# Altium PCB PCB1.PcbDoc
Units mil, origin at the board's own origin, x right, y up, seen from the top; angles counter-clockwise.
Board outline 3900 x 3900 mil, 2 copper layers (Top Layer, Bottom Layer), stack 61.756 mil thick; 49 components, 44 nets, 197 pads, 97 vias.
Unrouted connection lines stored in the file: 2.
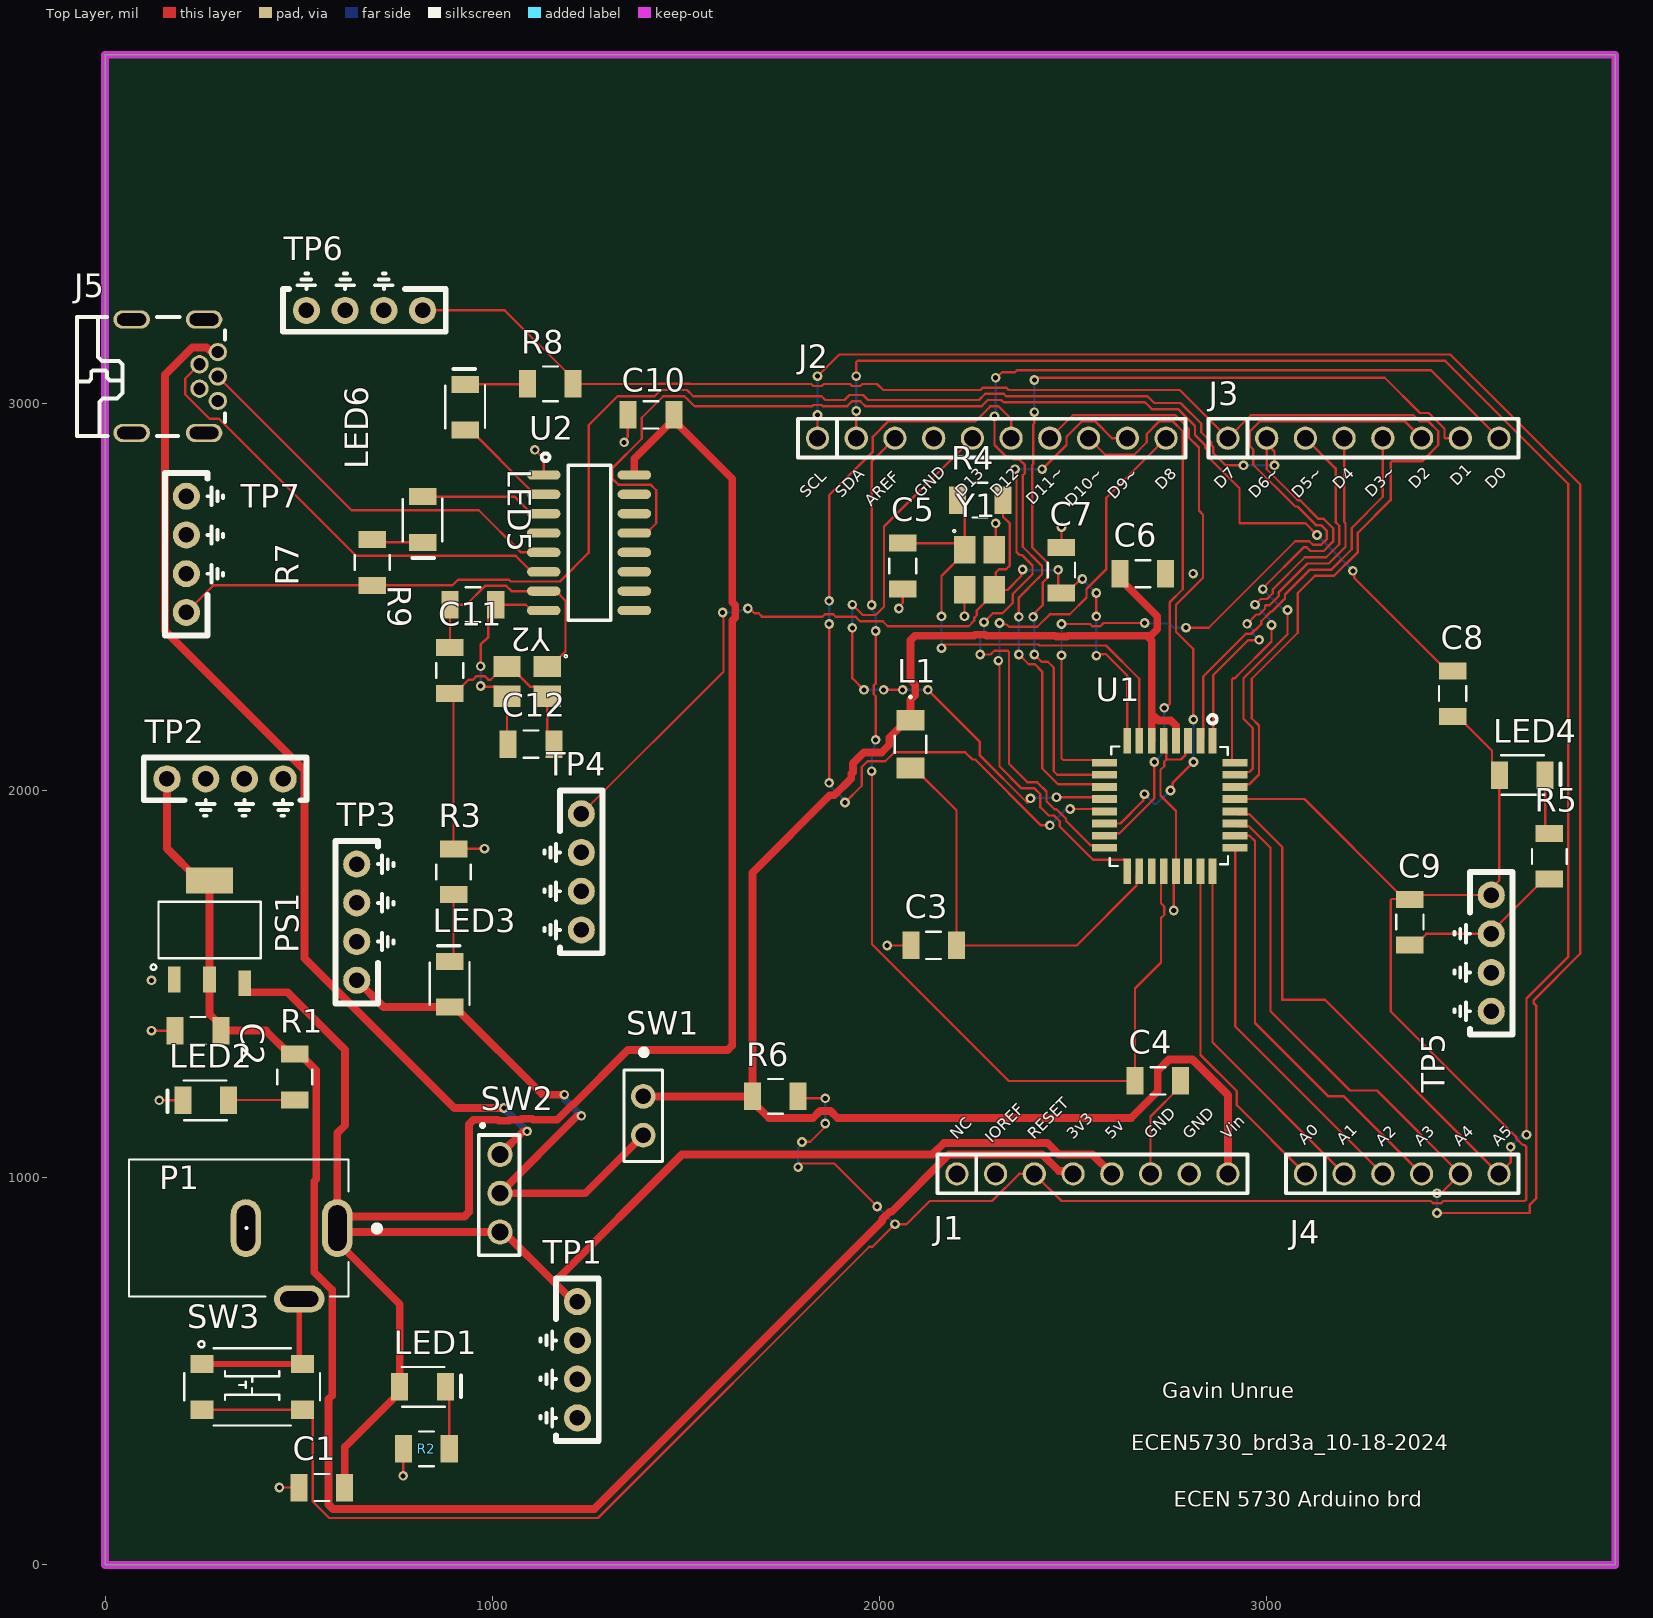
[diagram p0: Top Layer view]
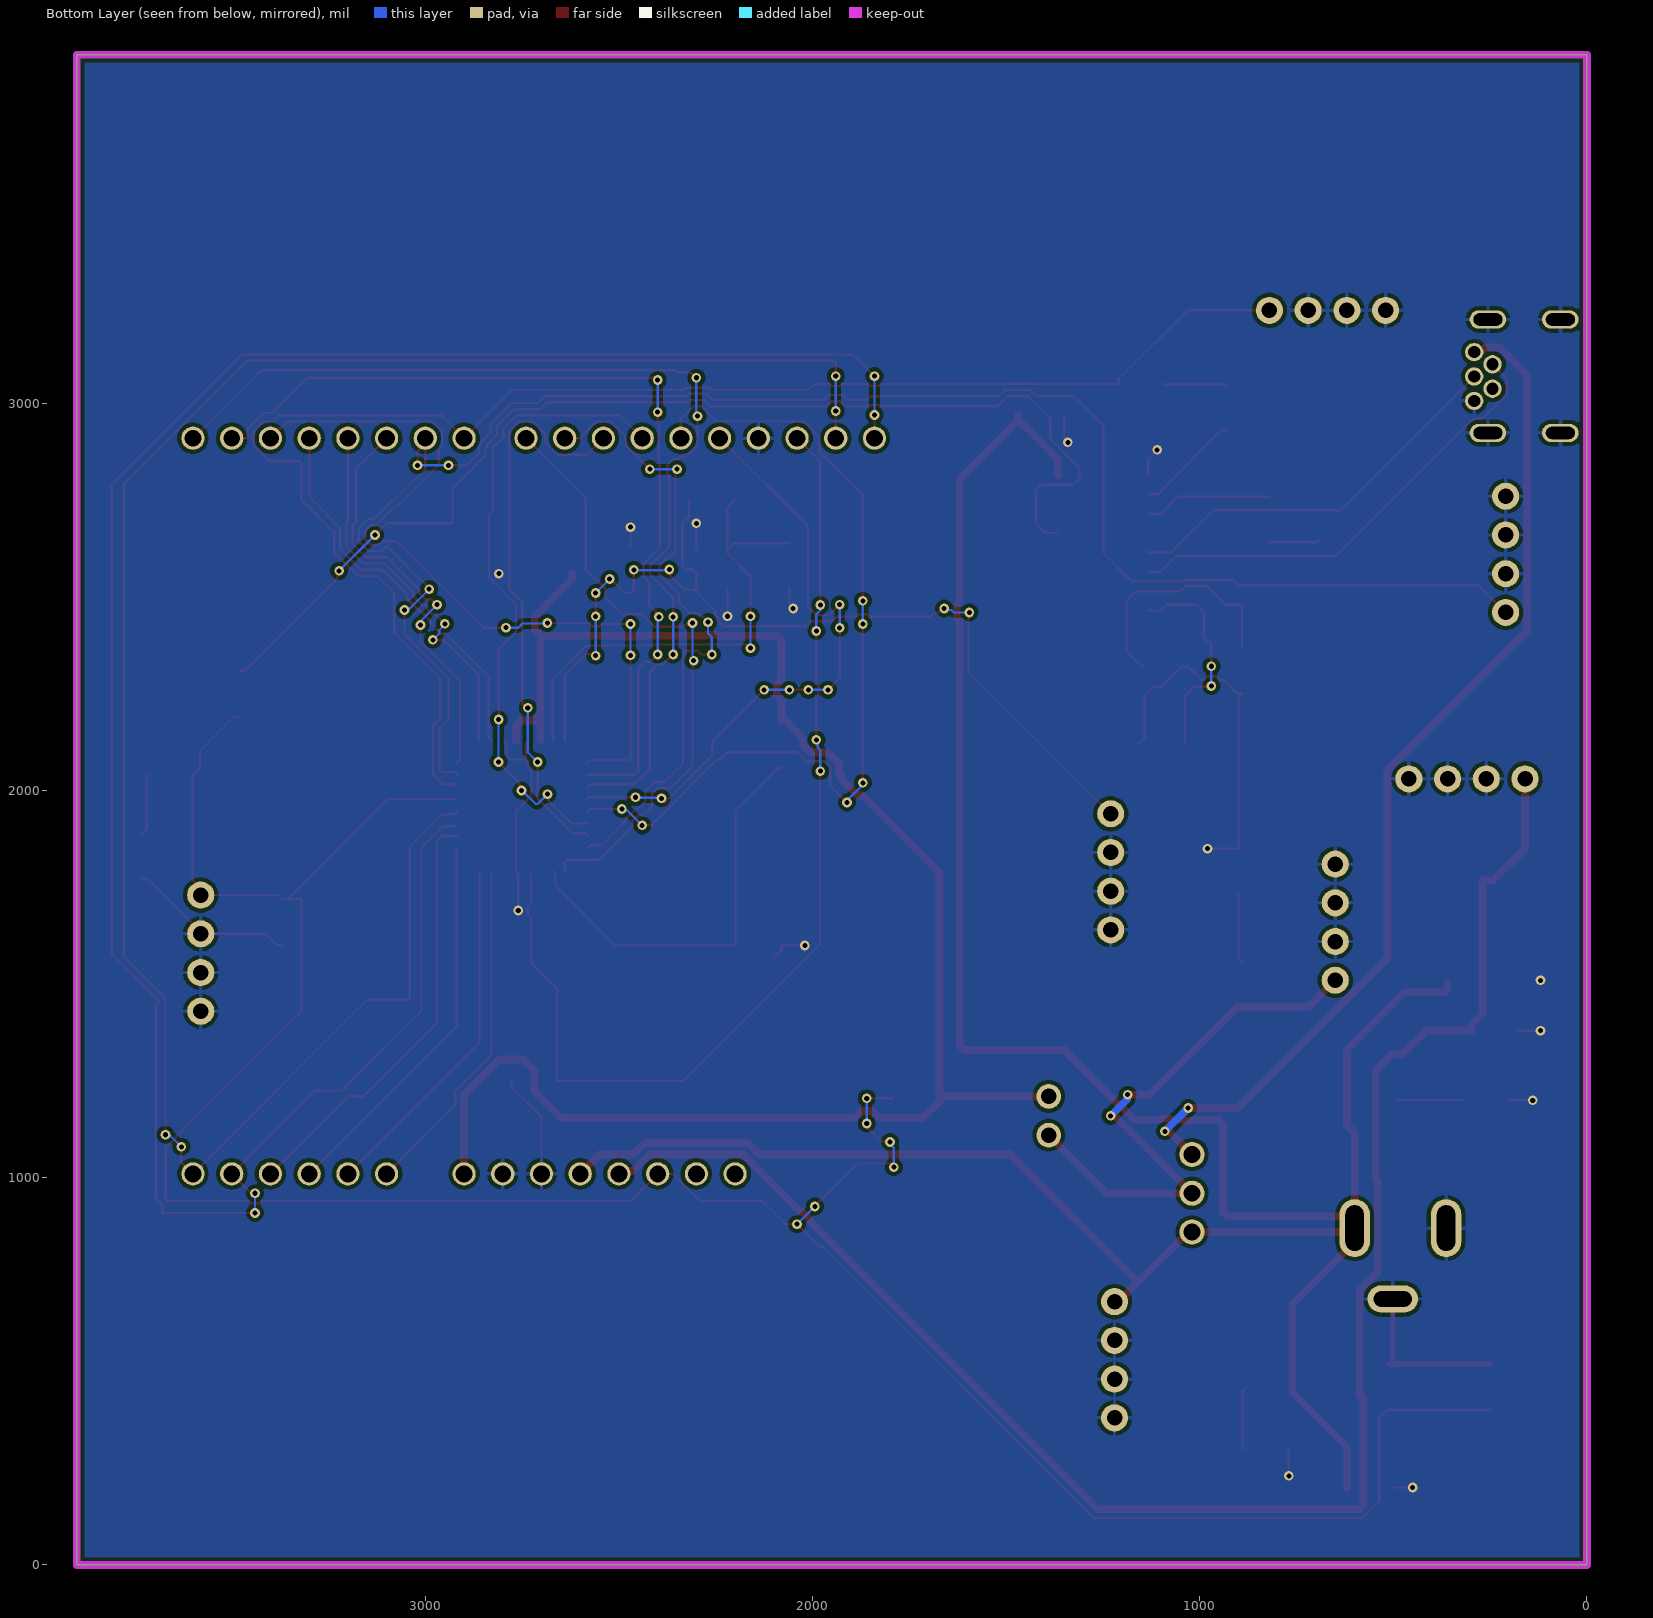
[diagram p1: Bottom Layer view, seen from below]
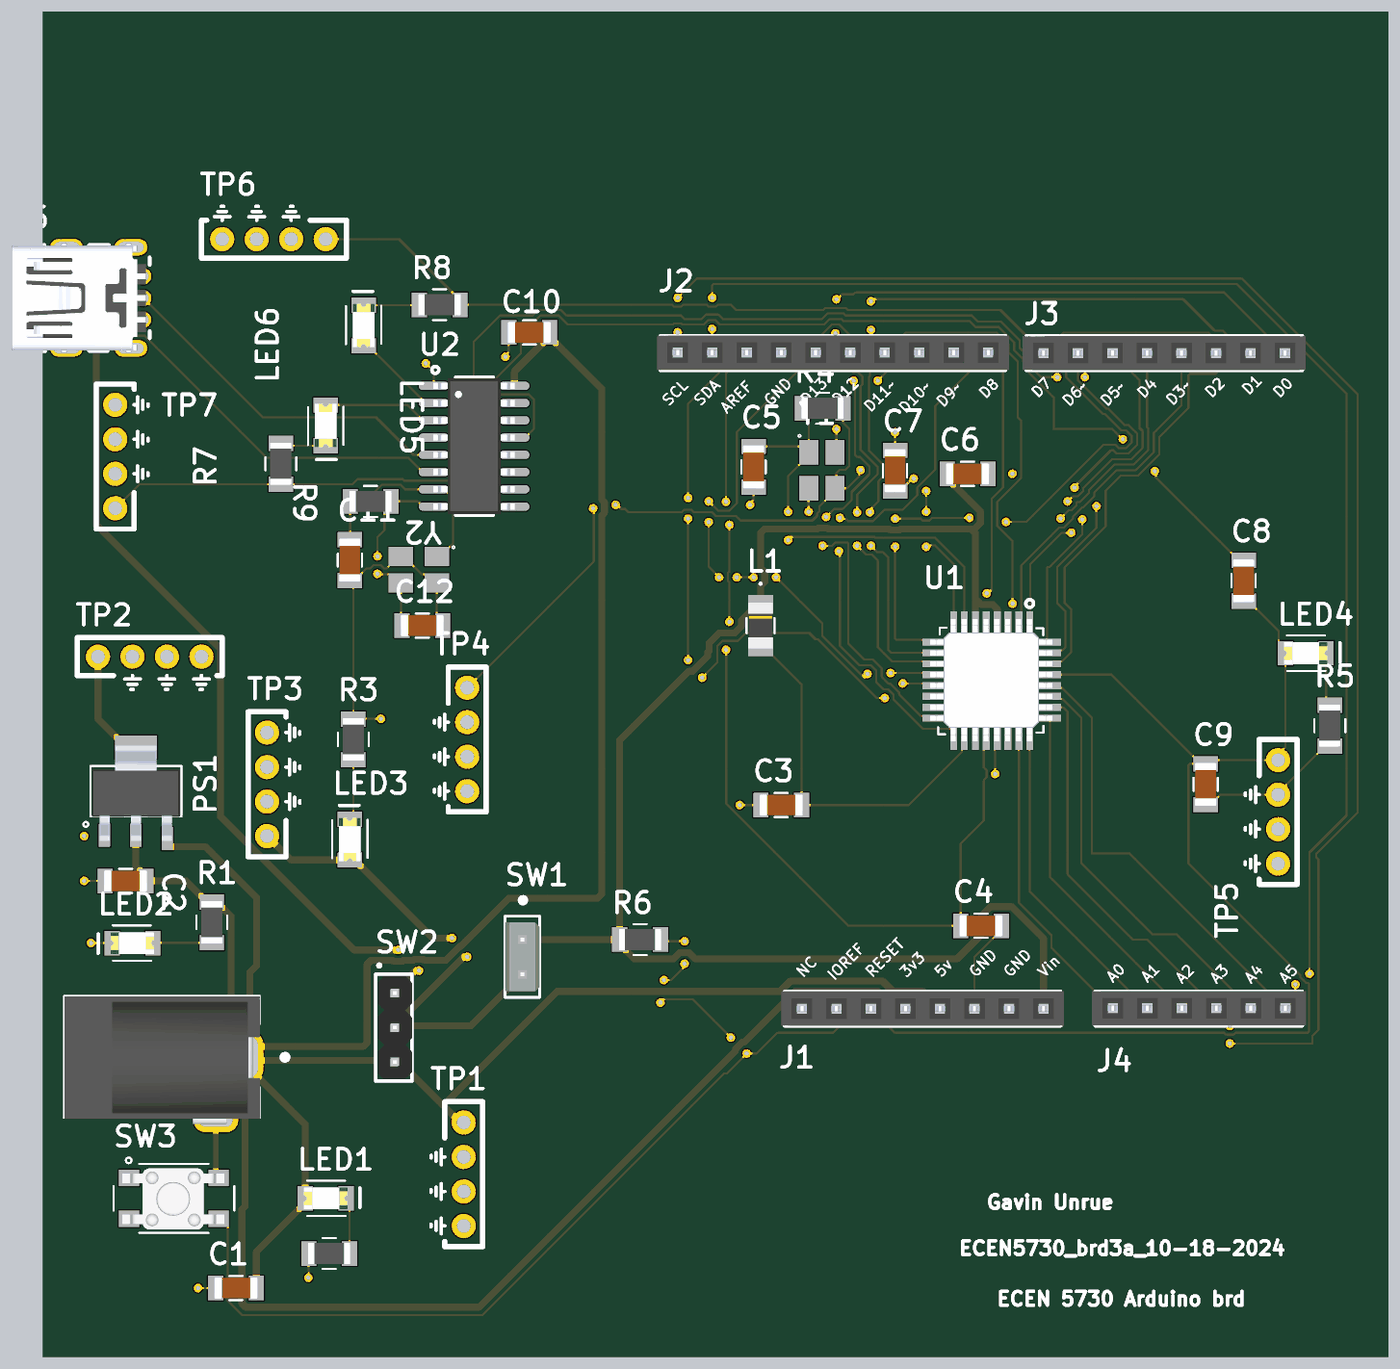
[diagram p2: 3D render of the assembled board from above, using the file's embedded part models]

## Layer stack, top to bottom
Top Solder: solder mask 1, SM-001, Dk 4
Top Layer: signal copper 1.378
Dielectric 1: core 59, Core-043, Dk 4.3
Bottom Layer: signal copper 1.378
Bottom Solder: solder mask 1, SM-001, Dk 4

## Board outline
0,0 3900,0 3900,3900 0,3900 0,1250

## Design rules (kind name [scope] priority, off if disabled: settings)
BoardOutlineClearance [All] p1: gap=10 ignorepadtopadclearanceinfootprint=FALSE except(0: Arc-SplitContinuation Track-SplitContinuation SMDPad-SplitContinuation THPad-SplitContinuation Via-SplitContinuation Fill-SplitContinuation Poly-SplitContinuation Region-SplitContinuation Text-SplitContinuation)
Clearance [All] p1: gap=10 ignorepadtopadclearanceinfootprint=FALSE
PlaneClearance [All] p1: clearance=10
PlaneConnect [All] p1: planeconnectstyle=Direct reliefexpansion=20 reliefentries=4 reliefconductorwidth=10 reliefairgap=10
PolygonConnect [All] p1: thpad.connectstyle=Relief thpad.reliefconductorwidth=10 thpad.reliefentries=4 thpad.polygonreliefangle="90 Angle" thpad.airgapwidth=10 smdpad.connectstyle=Direct smdpad.reliefconductorwidth=10 smdpad.reliefentries=4 smdpad.polygonreliefangle="90 Angle" smdpad.airgapwidth=10 via.connectstyle=Direct via.reliefconductorwidth=10 via.reliefentries=4 via.polygonreliefangle="90 Angle" via.airgapwidth=10
RoutingVias [All] p1: holewidth=13 width=25 viastyle="Through Hole" minholewidth=13 minwidth=25 maxholewidth=60 maxwidth=80
SolderMaskExpansion [All] p1: expansion=4 istentingtop=FALSE
UnRoutedNet [All] p1: checkbadconnections=TRUE
Width "Schematic Width Constraint" [InNet('+5')] p1: maxlimit=100 minlimit=10 preferedwidth=20 minimp=50.000000 maximp=50.000000 favimp=50.000000
Width [All] p2: maxlimit=100 minlimit=6 preferedwidth=6 minimp=50.000000 maximp=50.000000 favimp=50.000000
27 further rules are at their usual default settings.

## Components (designator, comment, footprint, x,y, rotation, side; value= is the part's Value field where it differs from the comment)
C1 "22uF" 1206_Passive_Capacitor 560,200 r0 top
C2 "1uF" 1206_Passive_Capacitor 240,1380 r0 top
C3 "22uF" 1206_Passive_Capacitor 2140,1600 r180 top
C4 "22uF" 1206_Passive_Capacitor 2719,1250 r0 top
C5 "22pF" 1206_Passive_Capacitor 2060,2580 r90 top
C6 "22uF" 1206_Passive_Capacitor 2680,2560 r180 top
C7 "22pF" 1206_Passive_Capacitor 2470,2569 r270 top
C8 "1uF" 1206_Passive_Capacitor 3480,2250 r270 top
C9 "47nF" 1206_Passive_Capacitor 3370,1660 r90 top
C10 "22uF" 1206_Passive_Capacitor 1410,2970 r180 top
C11 "22pF" 1206_Passive_Capacitor 890,2310 r90 top
C12 "22pF" 1206_Passive_Capacitor 1100,2120 r180 top
J1 "PPTC081LFBN-RC" 8_PIN_ARD-PWR_100MIL 2200,1010 r0 top value=Female
J2 "PPTC101LFBN-RC" 10_PIN_ARDUINO_100MIL 1840,2910 r0 top value=Female
J3 "PPTC081LFBN-RC" 8_PIN_ARD-DIG_100MIL 2900,2910 r0 top value=Female
J4 "PPTC061LFBN-RC" 6_PIN_ARD-Analog_100mil 3100,1010 r0 top value=Female
J5 "USB Mini" USB_MINI_B 180,3070 r270 top value="USB mini B"
L1 "FB_10uH_1206" AIML-1206_ABR-M 2080,2120 r270 top
LED1 "Red" LED_1206 820,460 r0 top
LED2 "Red" LED_1206 260,1200 r180 top
LED3 "Red" LED_1206 890,1500 r90 top
LED4 "Red" LED_1206 3660,2040 r0 top
LED5 "Red" LED_1206 820,2700 r270 top
LED6 "Red" LED_1206 930,2990 r90 top
P1 "Power Jack" Power_Jack 600,870 r180 top value="CONN PWR JACK 2X5.5MM SOLDER"
PS1 "AMS1117-3.3" LDO 270,1640 r0 top value="IC REG LINEAR 3.3V 800MA SOT223"
R1 "1k" 1206_Passive_Resitor 490,1260 r90 top value="1K Ohm"
R2 "1k" 1206_Passive_Resitor 830,300 r0 top value="1K Ohm"
R3 "1k" 1206_Passive_Resitor 900,1790 r270 top value="1K Ohm"
R4 "1M" 1206_Passive_Resitor 2260,2750 r180 top value="1M Ohm"
R5 "1k" 1206_Passive_Resitor 3730,1830 r90 top value="1K Ohm"
R6 "10k" 1206_Passive_Resitor 1731,1210 r0 top value=10KOhm
R7 "1k" 1206_Passive_Resitor 690,2589 r90 top value="1K Ohm"
R8 "1k" 1206_Passive_Resitor 1150,3050 r180 top value="1K Ohm"
R9 "1M" 1206_Passive_Resitor 950,2480 r180 top value="1M Ohm"
SW1 "led_on_off_sw" 2Pin-Header-Conn 1390,1210 r270 top
SW2 "PREC003SAAN-RC" 3_PIN_100mil 1020,1060 r270 top value="CONN HEADER VERT 3POS 2.54MM"
SW3 "TL3305AF160QG" Switch_JLC 380,460 r0 top
TP1 "5v TP" TP10x_Probe 1220,530 r270 top
TP2 "3.3v tp" TP10x_Probe 310,2030 r0 top
TP3 "rg5vtp" TP10x_Probe 650,1660 r90 top
TP4 "atmegaXTALtp" TP10x_Probe 1230,1790 r270 top
TP5 "resettp" TP10x_Probe 3580,1580 r270 top
TP6 "rxtp" TP10x_Probe 670,3240 r180 top
TP7 "txtp" TP10x_Probe 210,2610 r90 top
U1 "ATMEGA328P-ANR" ATMega328P 2750,1960 r90 top value="IC MCU 8BIT 32KB FLASH 32TQFP"
U2 "CH340G" "USB to serial" 1250,2640 r270 top value="USB to Serial"
Y1 "X322516MLB4SI" "Crystal resonator" 2260,2570 r270 top value=16MHz
Y2 "X322512MSB4SI" "Crystal resonator" 1090,2280 r180 top value=12MHz

## Footprints (in the part's own frame and the unit in brackets; to place one, negate y for a bottom-side part, rotate by r counter-clockwise, add the part's x,y. Pads: shape width x height; smd on the part's side, far side on the other; paste and mask are expansions set on the pad)
2Pin-Header-Conn [mm]
  round 1.62 hole 1.02: 1(0,0) 2(2.54,0)
  silkscreen extent -3.03,-1.27 4.26,1.26, body extent -1.27,-1.27 3.81,1.27, height 8.13
3_PIN_100mil [mm]
  round 1.65 hole 1.1: 1(0,0) 2(2.54,0) 3(5.08,0)
  silkscreen extent -2,-1.4 6.6,1.27, body extent -1.14,-1.27 6.48,1.27, height 8.38
6_PIN_ARD-Analog_100mil [mil]
  round 60 hole 43.31: 1(0,0) 2(100,0) 3(200,0) 4(300,0) 5(400,0) 6(500,0)
  silkscreen extent -50,-50 550,50, body extent -59,-49 561,51, height 335
8_PIN_ARD-DIG_100MIL [mil]
  round 60 hole 43.31: 1(0,0) 2(100,0) 3(200,0) 4(300,0) 5(400,0) 6(500,0) 7(600,0) 8(700,0)
  silkscreen extent -50,-50 750,50, body extent -60,-50 760,50, height 335
8_PIN_ARD-PWR_100MIL [mil]
  round 60 hole 43.31: 1(0,0) 2(100,0) 3(200,0) 4(300,0) 5(400,0) 6(500,0) 7(600,0) 8(700,0)
  silkscreen extent -50,-50 750,50, body extent -60,-50 760,50, height 335
10_PIN_ARDUINO_100MIL [mil]
  round 60 hole 43.31: 1(0,0) 2(100,0) 3(200,0) 4(300,0) 5(400,0) 6(500,0) 7(600,0) 8(700,0) 9(800,0) 10(900,0)
  silkscreen extent -50,-50 950,50, body extent -60,-49 960,51, height 335
1206_Passive_Capacitor [mil]
  rect 44x71 smd: 1(-59,0) 2(59,0)
  silkscreen extent -19,-35 19,35, body extent -63,-31 63,32, height 50
1206_Passive_Resitor [mil]
  rect 44x71 smd: 1(-59,0) 2(59,0)
  silkscreen extent -19,-45 19,45, body extent -61,-31 61,31, height 26
AIML-1206_ABR-M [mil]
  rect 54x73 smd paste+0 mask+0: 1(-61.5,0) 2(61.5,0)
  silkscreen extent -124,-41 22,41, body extent -66,-36 66,36, height 55
ATMega328P [mm]
  rect 1.65x0.508 smd mask+0.025: 1(4.28,-2.794) 2(4.28,-2.007) 3(4.28,-1.194) 4(4.28,-0.406) 5(4.28,0.406) 6(4.28,1.194) 7(4.28,2.007) 8(4.28,2.794) 17(-4.28,2.794) 18(-4.28,2.007) 19(-4.28,1.194) 20(-4.28,0.406) 21(-4.28,-0.406) 22(-4.28,-1.194) 23(-4.28,-2.007) 24(-4.28,-2.794)
  rect 0.508x1.65 smd mask+0.025: 9(2.843,4.28) 10(2.056,4.28) 11(1.243,4.28) 12(0.455,4.28) 13(-0.357,4.28) 14(-1.145,4.28) 15(-1.958,4.28) 16(-2.745,4.28) 25(-2.745,-4.28) 26(-1.958,-4.28) 27(-1.145,-4.28) 28(-0.357,-4.28) 29(0.455,-4.28) 30(1.243,-4.28) 31(2.056,-4.28) 32(2.843,-4.28)
  silkscreen extent -3.94,-3.81 5.97,3.94, body extent -4.45,-4.47 4.55,4.53, height 1.16
"Crystal resonator" [mm]
  rect 1.8x1.4 smd: 1(-1.32,-1.02) 2(1.32,-1.02) 3(1.32,0.92) 4(-1.32,0.92)
  silkscreen extent -2.63,-1.79 -2.45,-1.61, body extent -1.65,-1.2 1.65,1.2, height 0.8
LDO [mm]
  rect 0.838x1.7 smd: 1(-2.311,-3.25) 2(0,-3.25) 3(2.311,-3.5)
  rect 3.099x1.7 smd: 4(0,3.25)
  silkscreen extent -3.86,-2.62 3.35,1.85, body extent -3.25,-3.65 3.25,3.35, height 1.85
LED_1206 [mil]
  rect 44x71 smd: 1(-59,0) 2(59,0)
  silkscreen extent -54,-51 99,51, body extent -63,-31 63,31, height 28
Power_Jack [mm]
  oval 2x3.8 hole 1.2 slot 3 at 90 deg: 1(0,0) 2(6,0)
  oval 3.3x1.8 hole 1 slot 2.5 at 0 deg: 3(2.5,4.65)
  silkscreen extent -2.79,-4.5 13.68,4.5, body extent -0.76,-4.45 13.64,4.95, height 11.49
Switch_JLC [mm]
  rect 1.5x1.2 smd: 1(-3.3,1.5) 2(3.3,1.5) 3(-3.3,-1.5) 4(3.3,-1.5)
  silkscreen extent -4.44,-2.54 4.45,3, body extent -3.8,-2.29 3.7,2.21, height 3.7
TP10x_Probe [mil] "Small Probs footprint"
  round 70 hole 40: 1(-150,0) 2(-50,0) 2(50,0) 2(150,0)
  silkscreen extent -210,-95 210,55
"USB to serial" [mil]
  oval 24x86.61 smd: 1(-175,-117) 2(-125,-117) 3(-75,-117) 4(-25,-117) 5(25,-117) 6(75,-117) 7(125,-117) 8(175,-117) 9(175,117) 10(125,117) 11(75,117) 12(25,117) 13(-25,117) 14(-75,117) 15(-125,117) 16(-175,117)
  silkscreen extent -231,-122 201,56, body extent -197,-118 197,118, height 71
USB_MINI_B [mm]
  round 1.2 hole 0.8: 1(-1.58,2.826) 2(-0.78,1.622) 3(0.02,2.826) 4(0.82,1.622) 5(1.62,2.826)
  oval 1.2x2.4 hole 0.8 slot 1.9 at 90 deg: 6(-3.72,1.924) 7(3.72,1.924) 8(-3.72,-2.826) 9(3.72,-2.826)
  silkscreen extent -3.89,-6.42 3.93,3.3, body extent -4.04,-6.83 4.06,3.02, height 3.98

## Part data
C1 C3 C4 C6 C10: library part C_22uF_1206, "22uF ±10% 25V X5R 1206 Multilayer Ceramic Capacitors MLCC - SMD/SMT RoHS", LCSC Part#=C12891, MFR Part #=CL31A226KAHNNNE, Datasheet=https://datasheet.lcsc.com/lcsc/1811031514_Samsung-Electro-Mechanics-CL31A226KAHNNNE_C12891.pdf, Type=basic
C2 C8: library part C_1uF_1206, "MULTILAYER CERAMIC CAPACITORS MLCC - SMD/SMT 1UF 50V 1206 ROHS", LCSC Part#=C1848, MFR Part #=CL31B105KBHNNNE, Digikey Link=https://www.digikey.com/product-detail/en/C1206C105M4RACTU/399-8150-1-ND/3471873/?itemSeq=304982366, Type=Basic
C5 C7 C11 C12: library part C_22pF_1206, "22pF ±5% 1kV C0G 1206 Multilayer Ceramic Capacitors MLCC - SMD/SMT RoHS", LCSC Part#=C107174, MFR Part #=CC1206JKNPOCBN220, Datasheet=https://datasheet.lcsc.com/lcsc/1810241219_YAGEO-CC1206JKNPOCBN220_C107174.pdf, Type=Extended
C9: library part C_47nF_1206, "47nF ±5% 50V C0G 1206 Multilayer Ceramic Capacitors MLCC - SMD/SMT RoHS", LCSC Part#=C21812, MFR Part #=GRM31M5C1H473JA01L, Datasheet=https://datasheet.lcsc.com/lcsc/1810201313_Murata-Electronics-GRM31M5C1H473JA01L_C21812.pdf, Type=Extended
J1: library part JF_8_PIN_FEMA_ARD-Pwr, "8 Position Header Connector 0.100\" (2.54mm) Through Hole Tin", LCSC Part#=C27438, Digikey Link=https://www.digikey.com/product-detail/en/PPTC081LFBN-RC/S7006-ND/810147/?itemSeq=304982354, MFR Part #=PPTC081LFBN-RC, Type=Extended
J2: library part JF_10_PIN_FEMA_ARDUINO, "10 Position Header Connector 0.100\" (2.54mm) Through Hole Tin", LCSC Part#=C225507, Digikey Link=https://www.digikey.com/product-detail/en/PPTC101LFBN-RC/S7008-ND/810149/?itemSeq=304982352, MFR Part #=PPTC101LFBN-RC, Type=Extended
J3: library part JF_8_PIN_FEMA_ARD-Dig, "8 Position Header Connector 0.100\" (2.54mm) Through Hole Tin", LCSC Part#=C27438, Digikey Link=https://www.digikey.com/product-detail/en/PPTC081LFBN-RC/S7006-ND/810147/?itemSeq=304982354, MFR Part #=PPTC081LFBN-RC, Type=Extended
J4: library part JF_6_PIN_FEMA_ARD-Anolog, "6 Position Header Connector 0.100\" (2.54mm) Through Hole Tin", LCSC Part#=C40877, Digikey Link=https://www.digikey.com/product-detail/en/PPTC061LFBN-RC/S7004-ND/810145/?itemSeq=304982353, MFR Part #=PPTC061LFBN-RC, Type=Extended
J5: library part J_USB_B_Mini, "Through Hole USB Connectors RoHS", LCSC Part#=C46398, MFR Part #=920-462A2021D10102, Datasheet=https://datasheet.lcsc.com/szlcsc/2103081233_Jing-Extension-of-the-Electronic-Co-920-462A2021D10102_C46398.pdf, Type=Extended
L1: "25mA 10uH ±10% 800mΩ 1206  Inductors (SMD) ROHS", LCSC Part#=C1051, MFR Part #=CMI321609X100KT, Mfr_Name="FH (Guangdong Fenghua Advanced Tech)", Datasheet=https://datasheet.lcsc.com/lcsc/1810311314_FH--Guangdong-Fenghua-Advanced-Tech-CMI321609X100KT_C1051.pdf, Type=Basic
LED1 LED2 LED3 LED4 LED5 LED6: library part LED_RED_1206, "Red 621~631nm 1206 Light Emitting Diodes (LED) RoHS", LCSC Part#=C93133, MFR Part #=15-21/R6C-FQ1R1B/2T, Datasheet=https://datasheet.lcsc.com/szlcsc/1811151241_Everlight-Elec-15-21-R6C-FQ1R1B-2T_C93133.pdf, Type=Extended
P1: library part "P_Power Jack", "Power Barrel Connector Jack 2.10mm ID (0.083\"), 5.50mm OD (0.217\") Through Hole, Right Angle", LCSC Part#=C136744, MFR Part #=PJ-102A, Digikey Link=https://www.digikey.com/product-detail/en/PJ-102A/CP-102A-ND/275425/?itemSeq=304982367, Type=Extended
PS1: library part PS_AMS_LDO_3v3, "LOW DROPOUT REGULATORS(LDO) POSITIVE FIXED 1.3V @ 800MA 15V 3.3V 1A SOT-223 ROHS", LCSC Part#=C6186, MFR Part #=AMS1117-3.3, Type=Basic
R1 R2 R3 R5 R7 R8: library part R_1K_1206, "CHIP RESISTOR - SURFACE MOUNT 1KOHMS ±1% 1/4W 1206 ROHS", LCSC Part#=C4410, MFR Part #=RNCP1206FTD1K00CT, Digikey Link=https://www.digikey.com/product-detail/en/RNCP1206FTD1K00/RNCP1206FTD1K00CT-ND/2240675/?itemSeq=304982373, Type=Basic
R4 R9: library part R_1M_1206, "CHIP RESISTOR - SURFACE MOUNT 1MOHMS ±1% 1/4W 1206 ROHS", LCSC Part#=C17927, MFR Part #=RMCF1206JT1M00, Digikey Link=https://www.digikey.com/product-detail/en/RMCF1206JT1M00/RMCF1206JT1M00CT-ND/1942830/?itemSeq=304982358, Type=Basic
R6: library part R_10KOhm_1206, "10 kOhms ±5% 0.25W, 1/4W Chip Resistor 1206 (3216 Metric) Automotive AEC-Q200 Thick Film", LCSC Part#=C17902, MFR Part #=RMCF1206FT10K0, Digikey Link=https://www.digikey.com/en/products/detail/stackpole-electronics-inc/RMCF1206FT10K0/1759669, Type=Basic
SW1: library part SW_2Pin_100mil_Switch, "2Pin Header", LCSC Part#=C124375, Type=Extended
SW2: library part SW_3Pin_100mil_Switch, "Connector Header Through Hole 3 position 0.100\" (2.54mm)", LCSC Part#=C49257, Digikey Link=https://www.digikey.com/product-detail/en/PREC003SAAN-RC/S1012EC-03-ND/2774851/?itemSeq=304982371, MFR Part #=PREC003SAAN-RC, Type=Extended
SW3: library part SW_Push_Button_JLC, "Tactile Switch SPST-NO Top Actuated Surface Mount", LCSC Part#=C2837550, MFR Part #=KH-4.5X4.5X4.3H-STM, Datasheet=https://datasheet.lcsc.com/lcsc/2106081532_Shenzhen-Kinghelm-Elec-KH-4.5X4.5X4.3H-STM_C2837550.pdf, Type=Extended
TP1 TP2 TP3 TP4 TP5 TP6 TP7: library part TP_10x_Probe, "Test Point 300 mil centers"
U1: library part U_ATMega328P, "AVR AVR® ATmega Microcontroller IC 8-Bit 20MHz 32KB (16K x 16) FLASH 32-TQFP (7x7)", LCSC Part#=C14877, MFR Part #=ATMEGA328P-AU, Digikey Link=https://www.digikey.com/product-detail/en/ATMEGA328P-ANR/ATMEGA328P-ANRCT-ND/2774230/?itemSeq=304982365, Type=Basic
U2: library part U_USBtoSerial, "Transceiver USB 2.0 2Mbps SOP-16_150mil USB ICs RoHS", LCSC Part#=C14267, Datasheet=https://datasheet.lcsc.com/lcsc/2008191806_WCH-Jiangsu-Qin-Heng-CH340G_C14267.pdf, MFR Part #=CH340G, Type=Basic
Y1: library part X_16Mhz_Res, "±10ppm 16000000Hz -40℃~85℃ 贴片无源晶振 60Ω 9pF SMD3225-4P Crystals ROHS", LCSC Part#=C13738, MFR Part #=X322516MLB4SI, Type=Basic
Y2: library part X_12MHz_Res, "SMD Crystal Resonators 12MHz ±10ppm SMD-3225_4P RoHS", LCSC Part#=C9002, Datasheet=https://datasheet.lcsc.com/szlcsc/Yangxing-Tech-X322512MSB4SI_C9002.pdf, MFR Part #=X322512MSB4SI, Type=Basic

## Via types
v1: diameter 25, hole 13, Top Layer to Bottom Layer, 97 vias

## Nets (pads, with @x,y where several pads share a name; then routed paths per layer and width w, separated by ;. In a path a pad name is that pad's centre, name@x,y a point inside that pad or via, vN(x,y) a via of type N, cw(c..) or ccw(c..) an arc to the next point about the centre after c; other vN are vias at no path point)
3v: C2.2 J1.4 PS1.2 PS1.4 R1.2 TP2.1 | length 4489.5
  Top Layer w20: TP2.1 160,1850.42 242.46,1767.95 PS1.4 PS1.2 270,1422.5 299,1393.5 C2.2 415.5,1380 476.5,1319 R1.2 503.5,1319 545.5,1277 545.5,995.98 540.63,991.11 540.63,755.8 586.54,709.89 586.54,437.82 577,428.29 577,156.22 588.72,144.5 1263.79,144.5 2007.5,888.21 2007.5,893.46 2026.54,912.5 2031.79,912.5 2179.29,1060 2420.71,1060 2463.06,1017.65 2492.35,1017.65 J1.4
+5: C1.2 C10.1 J1.5 LED1.1 P1.1 PS1.3 SW2.3 TP1.1 U2.16 | length 7158.3
  Top Layer w20: PS1.3 361,1485.24 367.5,1478.74 471.26,1478.74 620,1330 620,1135.66 600,1115.66 P1.1@600,872.87 ; C1.2 619,304.5 761,446.5 LED1.1 761,673.57 600,834.57 600,860 P1.1 ; TP1.1 1210,680 1160,730 ; U2.16 1367,2857 1454.5,2944.5 1457,2944.5 C10.1@1469,2956.5 ; C10.1 C10.1@1469,2956.5 ; J1.5 2550,1060 2463.14,1060 2433.14,1090 2166.86,1090 2136.86,1060 1490,1060 1160,730 ; P1.1 P1.1@600,872.87 ; P1.1 610,860 SW2.3 1030,860 1160,730 ; P1.1@600,872.87 627.13,900 928.28,900 940,911.72 940,1138.28 951.72,1150 1014.04,1150 1016.54,1147.5 1043.46,1147.5 1045.96,1150 1074.04,1150 1076.54,1152.5 1103.46,1152.5 1105.96,1150 1167.57,1150 1207.57,1190 1210,1190 1350,1330 1608.28,1330 1620,1341.72 1620,2439.04 1627.5,2446.54 1627.5,2478.46 1620,2485.96 1620,2805.5 C10.1@1469,2956.5
dtr: C8.1 U2.13 | length 2991.8
  Top Layer w6: U2.13 1398.31,2665 1423.31,2690 1423.31,2775.36 1408.66,2790 1325.34,2790 1310.69,2804.64 1310.69,2833.22 1386,2908.53 1386,2962.88 1441.62,3018.5 1496.38,3018.5 1522.38,2992.5 1826.44,2992.5 1829.44,2995.5 1850.56,2995.5 1853.56,2992.5 1916.44,2992.5 1929.44,3005.5 1950.56,3005.5 1963.56,2992.5 2263.81,2992.5 2279.81,3008.5 2314.19,3008.5 2320.19,3002.5 2685.68,3002.5 2703.18,2985 2771.07,2985 2815,2941.07 2815,2918.44 2841,2892.44 2841,2885.56 2846,2880.56 2846,2864.81 2930,2780.81 2930,2690 3100,2690 v1(3130,2660) ; v1(3222.63,2567.37) 3226.27,2563.73 3226.27,2549.23 3466.5,2309 C8.1
  Bottom Layer w6: v1(3130,2660) v1(3222.63,2567.37)
GND: C1.1 C2.1 C3.2 C4.2 C5.1 C6.1 C7.1 C9.1 C10.2 C11.1 C12.1 J1.6 J1.7 J2.4 J5.5 J5.6 J5.7 J5.8 J5.9 LED2.2 P1.2 P1.3 PS1.1 R2.1 R3.1 R5.1 SW3.1 SW3.2 TP1.2 TP2.2 TP3.2 TP4.2 TP5.2 TP6.2 TP7.2 U1.3 U1.5 U1.21 U2.1 Y1.2 Y1.4 Y2.2 Y2.4 | length 3373.4
  Top Layer w6: v1(120,1380) C2.1 ; v1(140,1200) LED2.2 ; v1(450,200) C1.1 ; v1(770,230) 770,299 R2.1 ; v1(980,1850) 901,1850 R3.1 900,2241 C11.1 903.5,2251 938.5,2286 949.94,2286 959.44,2295.5 980.56,2295.5 990.06,2286 996,2286 1030.16,2320.16 Y2.2 1045.91,2320.16 1097.72,2268.34 1117.41,2268.34 Y2.4 1141.97,2137.03 C12.1 ; v1(1110,2880) 1133,2857 U2.1 ; v1(1340.71,2899.29) 1340.71,2904.44 1350,2913.73 1350,2969 C10.2 ; v1(2020,1600) C3.2 2081,1586.5 C3.2@2100,1567.5 ; v1(2050,2470) 2050,2475.14 2060,2485.14 C5.1 ; v1(2219.41,2450.11) 2219.41,2517.6 Y1.2 ; Y1.4 2300,2625.75 v1(2300,2690) ; C7.1 v1(2470,2680) ; J1.6 2700,1158.5 2778,1236.5 C4.2 ; U1.5 2741,2121.5 2741,2080 ; v1(2760,1690) 2760,1785.5 U1.21 2766,1947.5 2726,1987.5 2726,2053.46 2735.5,2062.96 2735.5,2074.5 2741,2080 ; U1.3 2790,2121.5 2790,2091.64 2778.36,2080 2741,2080 ; C9.1 3383.5,1601 3412.5,1630 3580,1630 3580,1634.5 3716.5,1771 R5.1
  Top Layer w15: SW3.1 SW3.2 501.57,527.4 P1.3
  other v1: 120,1510 2810,2560
NetC3_1: C3.1 L1.2 U1.18 | length 1082.2
  Top Layer w6: L1.2 2089.5,2058.5 2199,1949 C3.1 2509.37,1600 2664,1754.63 2664,1784.5 U1.18
NetC4_1: C4.1 J2.3 U1.20 | length 2748.7
  Top Layer w6: v1(1980,2050) 1980.76,2049.24 1980.76,1603.17 2333.94,1250 C4.1 2660,1488.76 2727,1555.76 2727,1670.94 2735.5,1679.44 2735.5,1700.56 2727,1709.06 2727,1784.5 U1.20 ; v1(1980,2478.92) 1980,2850 J2.3 ; v1(1990,2131) 1990,2243.94 1985.5,2248.44 1985.5,2271.56 1990,2276.06 v1(1990,2411.92)
  Bottom Layer w6: v1(1980,2050) 1980,2104.86 1986.36,2111.22 1986.36,2127.36 v1(1990,2131) ; v1(1980,2478.92) 1980,2465.86 1990,2455.86 v1(1990,2411.92)
NetC5_2: C5.2 R4.2 U1.7 Y1.1 | length 1297.2
  Top Layer w6: C5.2 2202.81,2639 Y1.1 ; v1(2160,2367.5) 2163.51,2371.01 2163.51,2377 2410.56,2377 2413.06,2374.5 2585.13,2374.5 2671,2288.63 U1.7 ; v1(2160,2450) 2160,2554.25 2219.84,2614.09 Y1.1 ; R4.2 2219.84,2731.16 Y1.1
  Bottom Layer w6: v1(2160,2367.5) v1(2160,2450)
NetC7_2: C7.2 R4.1 TP4.1 U1.8 Y1.3 | length 2540.5
  Top Layer w6: TP4.1 1597,2307 1597,2458 v1(1595,2460) ; v1(1660,2470) 1665.14,2470 1677.26,2457.88 1688.18,2457.88 1696.38,2449.68 1696.38,2449.01 1852.95,2449.01 1859.44,2455.5 1880.56,2455.5 1887.05,2449.01 1938.36,2449.01 1949.95,2437.42 2008.64,2437.42 2021.56,2424.5 2230.56,2424.5 2244.5,2438.44 2244.5,2445.56 2251.11,2452.17 2251.11,2465.05 2296.22,2510.16 Y1.3 ; R4.1 2319,2707.06 2336.78,2689.28 2336.78,2581.15 2327.44,2571.81 2309.34,2571.81 2300,2562.46 2300,2521.81 Y1.3 ; v1(2369.87,2570.93) 2366.23,2567.29 2366.23,2553.86 2330.4,2518.03 Y1.3 ; v1(2461.43,2570) 2461.43,2518.57 C7.2 2483.5,2510 2519.56,2546.06 v1(2523.94,2546.06) ; v1(2560,2348.4) 2563.64,2352.04 2578.04,2352.04 2578.5,2352.5 2584.5,2352.5 2640,2297 U1.8 ; v1(2560,2450) 2560,2501.49 2561.77,2503.26 2561.77,2508.23 v1(2560,2510)
  Bottom Layer w6: v1(1595,2460) 1635.5,2460 1641.86,2466.36 1656.36,2466.36 v1(1660,2470) ; v1(2369.87,2570.93) 2371.8,2569 2460.43,2569 v1(2461.43,2570) ; v1(2523.94,2546.06) v1(2560,2510) ; v1(2560,2348.4) v1(2560,2450)
NetC11_2: C11.2 R9.2 U2.7 Y2.1 | length 639.8
  Top Layer w6: C11.2 891,2370 R9.2 933.12,2480 981.62,2528.5 1036.38,2528.5 1049.88,2515 U2.7 1164.31,2515 1189.31,2490 1189.31,2359.62 1149.84,2320.16 Y2.1
NetC12_2: C12.2 R9.1 U2.8 Y2.3 | length 560.3
  Top Layer w6: v1(970,2270) 971.66,2268.34 1013.47,2268.34 Y2.3 1038.03,2122.97 C12.2 ; v1(970,2321) 970,2376.82 990,2396.82 990,2461 R9.1 1086.69,2480 1101.69,2465 U2.8
  Bottom Layer w6: v1(970,2270) v1(970,2321)
NetD1_1: LED6.1 U2.2 | length 273.5
  Top Layer w6: LED6.1 943.5,2931 1098.25,2776.25 1098.25,2773.31 1106.56,2765 U2.2
NetD1_4: LED5.1 U2.3 | length 331.2
  Top Layer w6: LED5.1 1057.69,2759 1101.69,2715 U2.3
NetJ2_1: J2.1 J4.5 U1.27 | length 5807.5
  Top Layer w6: J2.1 v1(1840,2970) ; v1(1840,3070) 1896,3126 3474,3126 3810,2790 3810,1578.89 3690,1458.89 3690,1450 3696.56,1443.44 3696.56,947.45 3679,929.89 3679,909 v1(3440,909) ; U1.27 2925.5,1907.93 2954.37,1907.93 3010,1852.3 3010,1430 3214.83,1225.17 3284.83,1225.17 J4.5 3450,960 v1(3440,960)
  Bottom Layer w6: v1(1840,2970) v1(1840,3070) ; v1(3440,909) v1(3440,960)
NetJ2_2: J2.2 J4.6 U1.28 | length 5330.3
  Top Layer w6: J2.2 v1(1940,2980) ; v1(1940,3070) 1940,3106.49 1943.51,3110 3460.81,3110 3778.5,2792.31 3778.5,1570.01 3671.06,1462.58 v1(3671.06,1111.06) ; U1.28 2925.5,1938.93 2955.37,1938.93 3040,1854.3 3040,1460 3150,1460 J4.6 3630,1040 v1(3630,1080)
  Bottom Layer w6: v1(1940,2980) v1(1940,3070) ; v1(3630,1080) 3657.43,1107.43 3667.43,1107.43 v1(3671.06,1111.06)
NetJ2_5: J2.5 U1.12 | length 1636.4
  Top Layer w6: v1(1930,2420) 1930,2290 v1(1960,2260) ; v1(1930,2480) 1956.58,2453.42 1990.56,2453.42 2011.5,2474.36 2011.5,2681.5 J2.5 ; v1(2011,2260) v1(2060,2260) ; v1(2125,2260) 2259.3,2125.7 2259.3,2090.63 2381.51,1968.42 2390,1976.9 v1(2390,1980) ; v1(2457,1982.62) 2576.8,1982.62 U1.12
  Bottom Layer w6: v1(1930,2420) v1(1930,2480) ; v1(1960,2260) v1(2011,2260) ; v1(2060,2260) v1(2125,2260) ; v1(2390,1980) 2391.31,1981.31 2455.69,1981.31 v1(2457,1982.62)
NetJ2_6: J2.6 U1.13 | length 2312.2
  Top Layer w6: v1(1870,2020) v1(1870,2430) ; v1(1870,2490) 1870,2762.63 1983,2875.63 1983,2913.81 2022.34,2953.16 2247.09,2953.16 2286.44,2992.5 2307.56,2992.5 2340,2960.06 J2.6 ; v1(1910.96,1969.04) 1954.5,2012.58 1954.5,2060.56 1969.44,2075.5 2015.12,2075.5 2038.12,2098.5 2221.5,2098.5 2240,2080 2247.31,2080 2417.31,1910 v1(2440,1910) ; v1(2492.38,1952.38) 2575.05,1952.38 U1.13
  Bottom Layer w6: v1(1870,2020) 1870,2015 1910.96,1974.04 v1(1910.96,1969.04) ; v1(1870,2430) v1(1870,2490) ; v1(2440,1910) 2478.74,1948.74 2488.74,1948.74 v1(2492.38,1952.38)
NetJ2_7: J2.7 U1.14 | length 1655
  Top Layer w6: J2.7 2499,2969 2764.44,2969 2799,2934.44 2799,2911.81 2825,2885.81 2825,2722.87 2835.5,2712.37 2835.5,2549.44 2765.97,2479.91 2765.97,2409.94 2810,2365.91 2810,2183.98 v1(2810.5,2183.48) ; U1.14 2622.3,1914.93 2680.86,1973.49 2680.86,1986.93 v1(2684.5,1990.56) ; v1(2751.5,2000) 2753.49,2000 2757,2003.51 2757,2019.77 v1(2811.14,2073.91)
  Bottom Layer w6: v1(2684.5,1990.56) 2710.05,1965.02 2715.02,1965.02 2750,2000 v1(2751.5,2000) ; v1(2810.5,2183.48) 2810.82,2183.16 2810.82,2074.23 v1(2811.14,2073.91)
NetJ2_8: J2.8 U1.15 | length 1468.6
  Top Layer w6: J2.8 2583,2867 2657.81,2867 2690,2899.19 2690,2920.81 2722.19,2953 2757.81,2953 2783,2927.81 2783,2519.57 2749.97,2486.54 2749.97,2223.96 2739.5,2213.48 v1(2735.5,2213.48) ; U1.15 2588.5,1889.93 2619.93,1889.93 2710,1980 v1(2710,2073.52)
  Bottom Layer w6: v1(2710,2073.52) 2735.5,2099.02 v1(2735.5,2213.48)
NetJ2_9: J2.9 U1.16 | length 1666.2
  Top Layer w6: v1(2260,2351.5) 2286.98,2351.5 2296.48,2361 2330.99,2361 2334.5,2357.49 2334.5,2069.06 2382.06,2021.5 2407.19,2021.5 2431.5,1997.19 2431.5,1972.06 2452.06,1951.5 2457.19,1951.5 2481.5,1927.19 2481.5,1922.06 2544.63,1858.93 2574.5,1858.93 U1.16 ; v1(2270,2435) 2292.92,2457.92 2299.36,2457.92 2299.44,2458 2317.57,2458 2344,2484.43 2344,2507.28 2395.37,2558.65 2395.37,2581.49 2368.43,2608.43 2361.57,2608.43 2354,2616 2354,2826 v1(2350,2830) ; v1(2420,2830) 2420.81,2830 2483,2892.19 2483,2913.81 2522.19,2953 2557.81,2953 2600.81,2910 J2.9
  Bottom Layer w6: v1(2260,2351.5) 2260,2395.68 2270,2405.68 v1(2270,2435) ; v1(2350,2830) v1(2420,2830)
NetJ2_10: J2.10 U1.17 | length 1611.6
  Top Layer w6: v1(2307.04,2335.5) 2310,2332.54 2310,2062.56 2367.06,2005.5 2400.56,2005.5 2415.5,1990.56 2415.5,1957.06 2437.06,1935.5 2450.56,1935.5 2465.5,1920.56 2465.5,1907.06 2551.58,1820.98 2633,1820.98 2640,1813.98 U1.17 ; v1(2310,2432.5) 2313.64,2428.86 2328.64,2428.86 2334.5,2423 2407.56,2423 2440.06,2455.5 2491.38,2455.5 2534.5,2498.62 2534.5,2520.56 2586,2572.06 2586,2756 J2.10
  Bottom Layer w6: v1(2307.04,2335.5) 2310,2338.46 v1(2310,2432.5)
NetJ3_3: J3.3 U1.32 | length 1073
  Top Layer w6: U1.32 2917.21,2071.93 2910.21,2078.93 2910.21,2286.7 2913.51,2290 2918.19,2290 2924,2295.81 2924,2296.63 3012.38,2385 v1(3012.38,2427.62) ; v1(2970,2480) 2984.5,2494.5 3000.56,2494.5 3015.5,2509.44 3015.5,2519.44 3098.56,2602.5 3153.82,2602.5 3187.5,2636.18 3187.5,2683.82 3178,2693.32 3178,2832 J3.3
  Bottom Layer w6: v1(2970,2480) 3008.74,2441.26 3008.74,2431.26 v1(3012.38,2427.62)
NetJ3_4: J3.4 U1.1 | length 1009.5
  Top Layer w6: U1.1 2861.97,2130.47 2861.97,2298.03 2952.44,2388.5 2979.81,2388.5 v1(2980.66,2389.34) ; v1(2949.59,2430.41) 2949.59,2430.91 2973.19,2454.5 2980.56,2454.5 2995.5,2469.44 2995.5,2476.81 2997.19,2478.5 3007.19,2478.5 3031.5,2502.81 3031.5,2512.81 3105.19,2586.5 3160.44,2586.5 3203.5,2629.56 3203.5,2690.44 3200,2693.94 J3.4
  Bottom Layer w6: v1(2949.59,2430.41) 2949.59,2428.49 2964.25,2413.84 2964.25,2405.75 v1(2980.66,2389.34)
NetJ3_5: J3.5 U1.2 | length 1019.1
  Top Layer w6: U1.2 2836,2135.5 2836,2294.69 2945.81,2404.5 2959.75,2404.5 2970.09,2414.84 2970.91,2414.84 2985.88,2429.81 2985.88,2437.19 3011.19,2462.5 3013.82,2462.5 3047.5,2496.18 3047.5,2506.19 3111.81,2570.5 3167.07,2570.5 3219.5,2622.93 3219.5,2678.19 3300,2758.69 J3.5
NetJ3_6: J3.6 U1.9 | length 2104.6
  Top Layer w6: v1(2470,2349) 2470,2083.51 2474.59,2078.93 2574.5,2078.93 U1.9 ; v1(2470,2430) 2543.94,2430 2549.44,2424.5 2570.56,2424.5 2578.56,2432.5 v1(2685,2432.5) ; v1(2791.47,2420.5) 2850.5,2420.5 3074,2644 3109.94,2644 3119.44,2634.5 3140.56,2634.5 3155.5,2649.44 3155.5,2670.56 3140.56,2685.5 3127.13,2685.5 3079.22,2733.41 3073.56,2733.41 2965.5,2841.47 2965.5,2880.39 2957,2888.89 2957,2927.81 2982.19,2953 3357,2953 J3.6
  Bottom Layer w6: v1(2470,2349) v1(2470,2430) ; v1(2685,2432.5) 2686.25,2431.25 2748.75,2431.25 2759.5,2420.5 v1(2791.47,2420.5)
NetJ3_7: J3.7 U1.10 | length 2394
  Top Layer w6: v1(2397,2448.5) 2397,2454.37 2421.5,2478.87 2421.5,2537.38 2435.93,2551.81 2435.93,2586.19 2394.5,2627.62 2394.5,2840.56 2397,2843.06 2397,2944.71 2400,2947.71 v1(2400,2977) ; v1(2400,2351.5) 2418.82,2332.68 2434.82,2332.68 2450,2317.5 2450,2050 2459.07,2040.93 U1.10 ; v1(2400,3060) 2400,3062.49 2403.51,3066 3304.81,3066 3395.72,2975.09 3418.35,2975.09 3459,2934.44 3459,2911.81 3460.81,2910 J3.7
  Bottom Layer w6: v1(2397,2448.5) 2400,2445.5 v1(2400,2351.5) ; v1(2400,2977) v1(2400,3060)
NetJ3_8: J3.8 U1.11 | length 2702.5
  Top Layer w6: v1(2297,2967) 2297,2892.19 2326.78,2862.41 2340.22,2862.41 2347.13,2855.5 2360.56,2855.5 2375.5,2840.56 2375.5,2819.44 2370,2813.94 2370,2629.49 2410.4,2589.09 2419.93,2579.56 2419.93,2558.44 2411.4,2549.91 2360,2498.51 v1(2360,2448.5) ; v1(2300,3066) 2302.41,3066 2316.41,3080 2350,3080 2355.5,3085.5 3424.5,3085.5 J3.8 ; v1(2360,2351.5) 2385.5,2326 2401.5,2326 2420,2307.5 2420,2057.37 2461.44,2015.93 2574.5,2015.93 U1.11
  Bottom Layer w6: v1(2297,2967) 2300,2970 v1(2300,3066) ; v1(2360,2351.5) v1(2360,2448.5)
NetJ4_1: J4.1 U1.23 | length 893.7
  Top Layer w6: U1.23 2829,1317.31 2923,1223.31 2923,1187 J4.1
NetJ4_2: J4.2 U1.24 | length 922.3
  Top Layer w6: U1.24 2860,1350 J4.2
NetJ4_3: J4.3 U1.25 | length 1000
  Top Layer w6: U1.25 2918.5,1391.5 J4.3
NetJ4_4: J4.4 U1.26 | length 1118.1
  Top Layer w6: U1.26 2956.49,1882.93 2970,1869.41 2970,1400 3159.83,1210.17 3199.83,1210.17 J4.4
NetJ5_2: J5.2 U2.6 | length 1208.6
  Top Layer w6: J5.2 207.24,3064.09 207.24,3022.56 269.63,2960.17 294.55,2960.17 648.71,2606 1060.69,2606 1101.69,2565 U2.6
NetJ5_3: J5.3 U2.5 | length 1029.9
  Top Layer w6: J5.3 636.47,2724 965.32,2724 1074.32,2615 U2.5
NetLED1_2: LED1.2 R2.2 | length 164.1
  Top Layer w6: LED1.2 889,450 R2.2
NetLED2_1: LED2.1 R1.1 | length 171.4
  Top Layer w6: LED2.1 320,1201 R1.1
NetLED3_2: LED3.2 R3.2 | length 176.1
  Top Layer w6: LED3.2 900,1569 R3.2
NetLED4_2: LED4.2 R5.2 | length 155.6
  Top Layer w6: LED4.2 3719,1900 R5.2
NetLED5_2: LED5.2 R7.2 | length 132.9
  Top Layer w6: R7.2 697,2641 LED5.2
NetLED6_2: LED6.2 R8.2 | length 161.4
  Top Layer w6: LED6.2 1090,3049 R8.2
reset: C8.2 C9.2 J1.3 LED4.1 R6.2 SW3.3 SW3.4 TP5.1 U1.29 | length 6938.1
  Top Layer w6: SW3.3 SW3.4 515.83,400.94 536.45,380.32 536.45,164.24 579.19,121.5 1273.32,121.5 1973.59,821.78 1981.78,821.78 v1(2040,880) 2070,880 2130,940 2290.81,940 2360.81,1010 J1.3 2470,940 3423.94,940 3429.44,934.5 3450.56,934.5 3456.06,940 3666.49,940 3670,943.51 3670,1080 3665.5,1084.5 3661.56,1084.5 3644.5,1101.56 3644.5,1105.5 3320,1430 3320,1716.49 3323.51,1720 C9.2@3355.5,1720 ; v1(1790,1027.5) 1790,1037 1883,1037 v1(1994.04,925.96) ; R6.2 1795,1205 v1(1860,1205) ; v1(1800,1092.5) 1800.5,1093 1821.5,1093 1860,1131.5 v1(1860,1140) ; U1.29 3097.57,1977.93 C9.2@3355.5,1720 ; C8.2 3493.5,2191 3582,2102.5 3582,2059 LED4.1 3601,1768.32 3580,1747.32 TP5.1 3381,1730 3371,1720 C9.2@3355.5,1720
  Bottom Layer w6: v1(1790,1027.5) 1790,1077.36 1800,1087.36 v1(1800,1092.5) ; v1(1860,1140) v1(1860,1205) ; v1(1994.04,925.96) v1(2040,880)
rg5v: LED3.1 SW1.2 SW2.2 TP3.1 | length 1456.1
  Top Layer w20: TP3.1 719,1441 LED3.1 903.5,1441 1130.09,1214.41 v1(1186.12,1214.41) ; v1(1230,1160) 1220,1160 SW2.2 1240,960 SW1.2
  Bottom Layer w20: v1(1186.12,1214.41) 1187.08,1213.46 1187.08,1202.92 v1(1230,1160)
rg5vsw: C6.2 J1.8 L1.1 R6.1 SW1.1 U1.4 U1.6 | length 4509.5
  Top Layer w20: SW1.1 R6.1 ; C6.2 2621,2546.5 2717.5,2450 2717.5,2416.54 2700.96,2400 2690,2400 ; U1.6 2703,2190.47 2703,2387 2690,2400 ; 2707,2190.47 2710.98,2190.47 2720.47,2180.98 2752.28,2180.98 2766,2167.27 U1.4 ; J1.8 2900,1213.78 2808.28,1305.5 2747.72,1305.5 2719,1276.78 2719,1223.22 2650.28,1154.5 1891.46,1154.5 1873.46,1172.5 1846.54,1172.5 1828.54,1154.5 1714,1154.5 1672,1196.5 R6.1 ; R6.1 1672,1787.96 1871.54,1987.5 1883.46,1987.5 1926.93,2030.97 1926.93,2042.89 1931.5,2047.46 1931.5,2070.09 1959.91,2098.5 2005.59,2098.5 2025.22,2118.13 2025.22,2136.22 2070.5,2181.5 L1.1 2080,2234.04 2092.5,2246.54 2092.5,2273.46 2080,2285.96 2080,2388.28 2091.72,2400 2244.04,2400 2246.54,2402.5 2273.46,2402.5 2275.96,2400 2454.04,2400 2456.54,2397.5 2483.46,2397.5 2485.96,2400 2690,2400
rxled: J3.1 R8.1 TP6.1 U1.30 | length 4061.3
  Top Layer w6: TP6.1 1032.5,3240 1209,3063.5 R8.1 1427.86,3050 1428.36,3050.5 1509.64,3050.5 1510.14,3050 1823.94,3050 1829.44,3044.5 1850.56,3044.5 1856.06,3050 1923.94,3050 1929.44,3044.5 1950.56,3044.5 1956.06,3050 1994,3050 2009.5,3034.5 2260.56,3034.5 2266.56,3040.5 2327.44,3040.5 2333.44,3034.5 2775.5,3034.5 J3.1 2959,2969 3379.18,2969 3395.18,2953 3417.81,2953 3443,2927.81 3443,2892.19 3400.81,2850 3323.51,2850 3320,2846.49 3320,2750 3235.5,2665.5 3235.5,2616.3 3173.7,2554.5 3124.5,2554.5 3080,2510 3080,2407.37 2961.31,2288.69 2961.31,2186.58 2979.98,2167.91 2979.98,2041.54 2954.37,2015.93 2925.5,2015.93 U1.30@2922,2012.43
txled: J3.2 R7.1 TP7.1 U1.31 | length 4635.4
  Top Layer w6: TP7.1 280,2530 R7.1 897.42,2530 911.92,2544.5 1043.01,2544.5 1047.51,2540 1174.66,2540 1249.14,2614.48 1249.14,2944.02 1323.62,3018.5 1418.99,3018.5 1434.99,3034.5 1503.01,3034.5 1519.01,3018.5 1850.19,3018.5 1860.19,3008.5 1909.81,3008.5 1922.81,3021.5 1957.19,3021.5 1970.19,3008.5 2257.18,3008.5 2273.18,3024.5 2320.82,3024.5 2326.82,3018.5 2692.31,3018.5 2709.81,3001 2777.69,3001 2831,2947.69 2831,2925.07 2857,2899.07 2857,2892.19 2862,2887.19 2862,2871.44 2893.44,2840 v1(2940,2840) ; U1.31 2925.5,2047.93 2955.37,2047.93 2963.98,2056.54 2963.98,2161.28 2940,2185.26 2940,2290 3053.69,2403.69 v1(3053.69,2466.31) ; v1(2990,2520) 2990,2522.63 3095.37,2628 3103.31,2628 3112.81,2618.5 3147.19,2618.5 3171.5,2642.81 3171.5,2677.19 3147.19,2701.5 3133.75,2701.5 3085.84,2749.41 3080.18,2749.41 3000,2829.59 J3.2@3000,2895.39 ; J3.2 J3.2@3000,2895.39 ; v1(3020,2840) 3020,2875.39 J3.2@3000,2895.39
  Bottom Layer w6: v1(2940,2840) v1(3020,2840) ; v1(2990,2520) 3040.05,2469.95 3050.05,2469.95 v1(3053.69,2466.31)
usb5v: J5.1 SW2.1 | length 2681.1
  Top Layer w20: J5.1 286.04,3137.42 268.85,3137.42 261.93,3144.34 225.8,3144.34 155,3073.54 155,2412.78 515,2052.78 515,1567.22 902.22,1180 v1(1030,1180) ; SW2.1 1080,1120 v1(1090,1120)
  Bottom Layer w20: v1(1030,1180) v1(1090,1120)
pads on no net: J1.1 J1.2 J5.4 U1.19 U1.22 U2.4 U2.9 U2.10 U2.11 U2.12 U2.14 U2.15

## Polygon pours and split planes (outlines as drawn)
GND on Bottom Layer "NONET_L-01_P-001" (solid, pour order 1): 0,3900 3900,3900 3900,0 0,0

## Keep-outs
Keep-Out Layer:
  the board outline again, w20

## Silkscreen, mask and mechanical layers (free items; w line width, h text height)
Top Overlay:
  text "Gavin Unrue" at 2730,430 h40
  text "ECEN5730_brd3a_10-18-2024" at 2650,296.66 h40
  text "ECEN 5730 Arduino brd" at 2760,150 h40

## Text inside footprints (layer, text, board x,y; h text height)
J1: Top Overlay "RESET" at 2400,1097.07 h30 r45; Top Overlay "Vin" at 2900,1097.07 h30 r45; Top Overlay "GND" at 2800,1097.07 h30 r45; Top Overlay "GND" at 2700,1097.07 h30 r45; Top Overlay "5v" at 2600,1097.07 h30 r45; Top Overlay "3v3" at 2500,1097.07 h30 r45; Top Overlay "IOREF" at 2290,1088.39 h30 r45; Top Overlay "NC" at 2200,1097.07 h30 r45
J2: Top Overlay "SCL" at 1811,2753.21 h30 r45; Top Overlay "SDA" at 1903,2753.21 h30 r45; Top Overlay "AREF" at 1979,2732 h30 r45; Top Overlay "GND" at 2106,2753.21 h30 r45; Top Overlay "D13" at 2212,2756.74 h30 r45; Top Overlay "D12" at 2303,2756.74 h30 r45; Top Overlay "D11~" at 2396,2735.53 h30 r45; Top Overlay "D10~" at 2497,2732 h30 r45; Top Overlay "D9~" at 2606,2749.67 h30 r45; Top Overlay "D8" at 2729,2774.41 h30 r45
J3: Top Overlay "D7" at 2881,2776.81 h30 r45; Top Overlay "D6~" at 2971,2752.07 h30 r45; Top Overlay "D4" at 3187,2775 h30 r45; Top Overlay "D3~" at 3271,2755 h30 r45; Top Overlay "D2" at 3384,2777 h30 r45; Top Overlay "D1" at 3491,2785 h30 r45; Top Overlay "D0" at 3581,2776.81 h30 r45; Top Overlay "D5~" at 3081,2752.07 h30 r45
J4: Top Overlay "A5" at 3598,1079.07 h30 r45; Top Overlay "A4" at 3498,1079.07 h30 r45; Top Overlay "A3" at 3398,1079.07 h30 r45; Top Overlay "A2" at 3298,1079.07 h30 r45; Top Overlay "A0" at 3098,1082 h30 r45; Top Overlay "A1" at 3198,1082 h30 r45